# Altium PCB QCopterFCs_Pcb.PcbDoc
Units mm, origin at the board's own origin, x right, y up, seen from the top; angles counter-clockwise.
Board outline 26 x 26 mm, 4 copper layers (Top Layer, Signal Layer 1, Signal Layer 2, Bottom Layer), stack 0.98 mm thick; 39 components, 54 nets, 258 pads, 82 vias.
Unrouted connection lines stored in the file: 1.
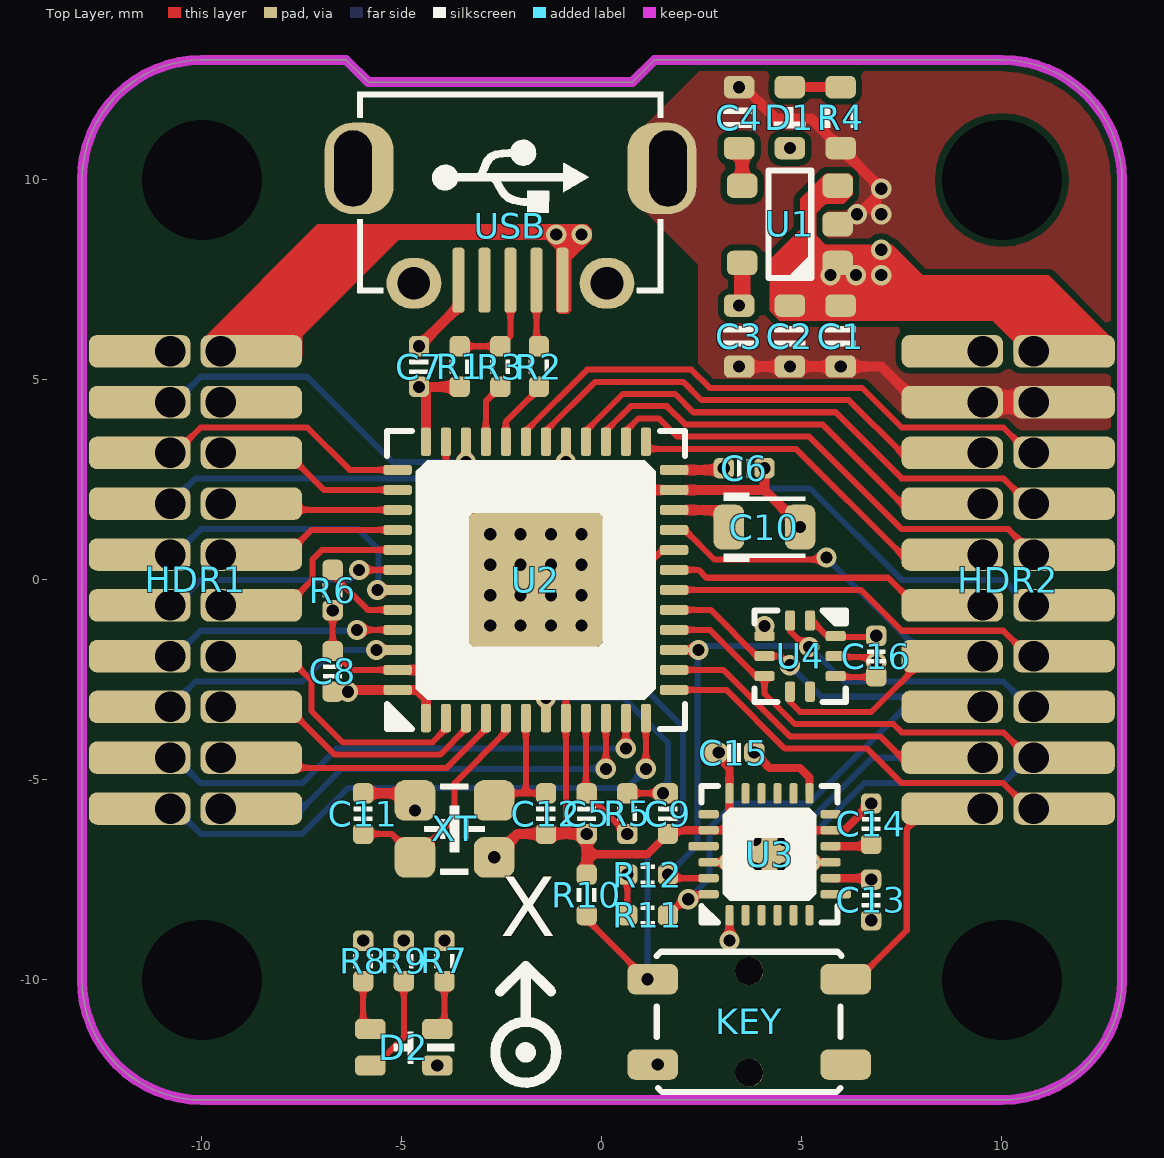
[diagram p0: Top Layer view]
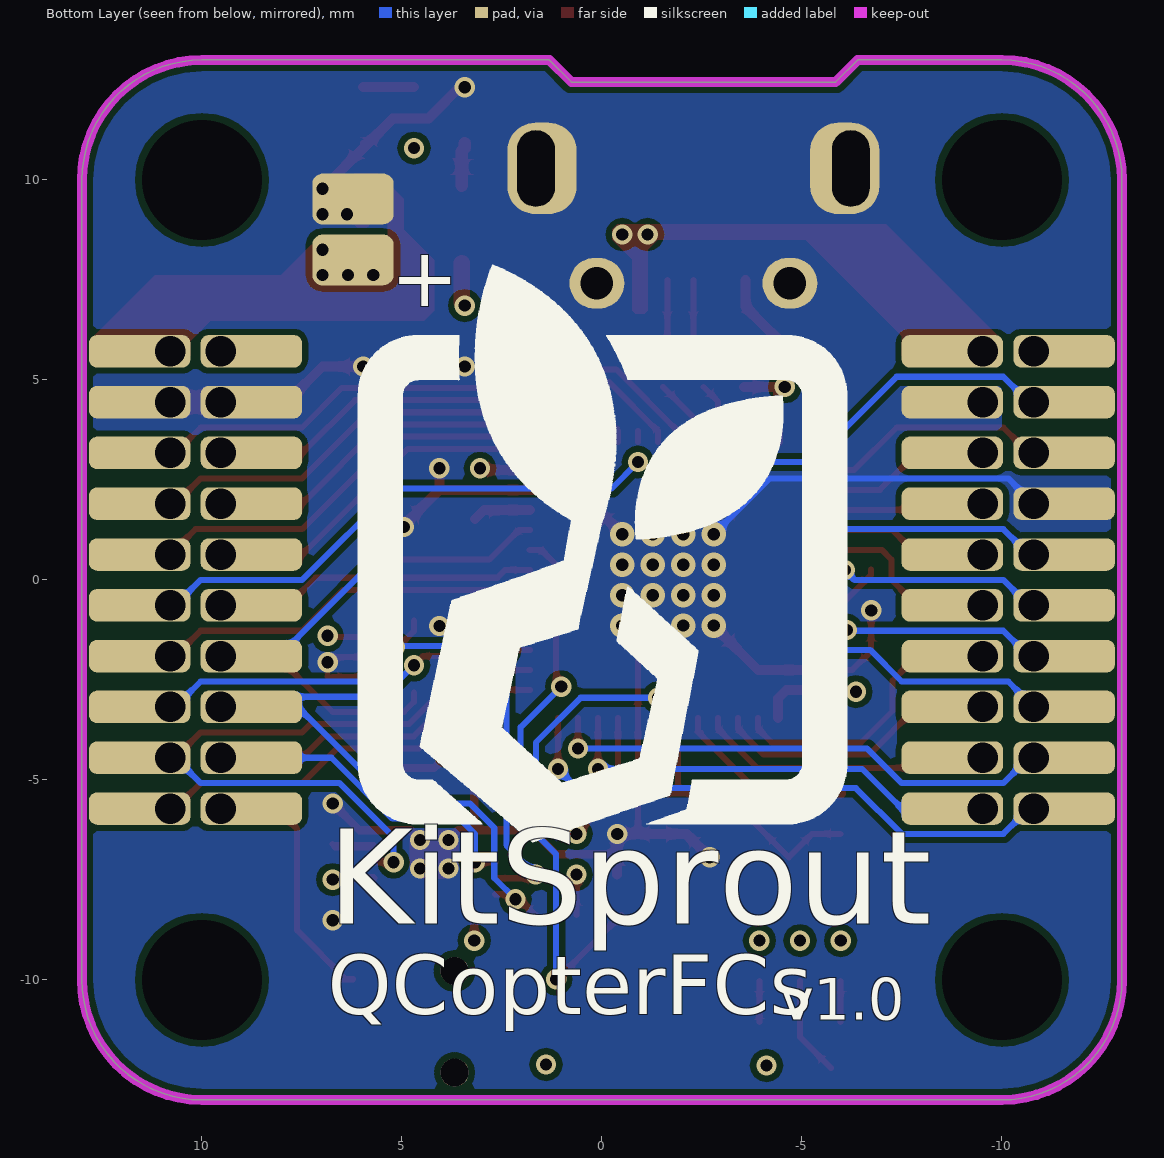
[diagram p1: Bottom Layer view, seen from below]
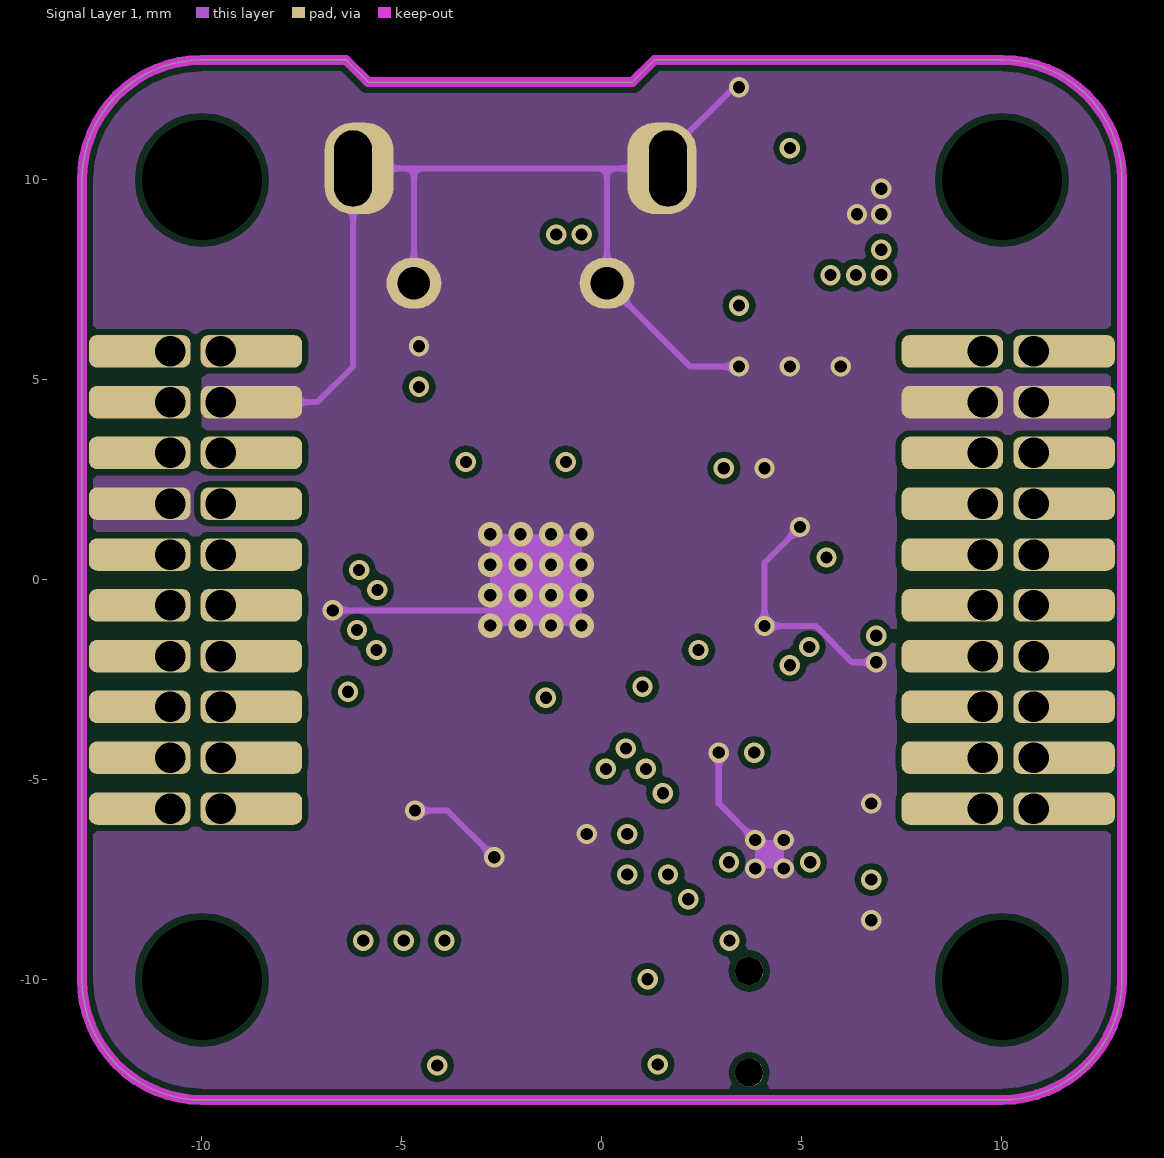
[diagram p2: Signal Layer 1]
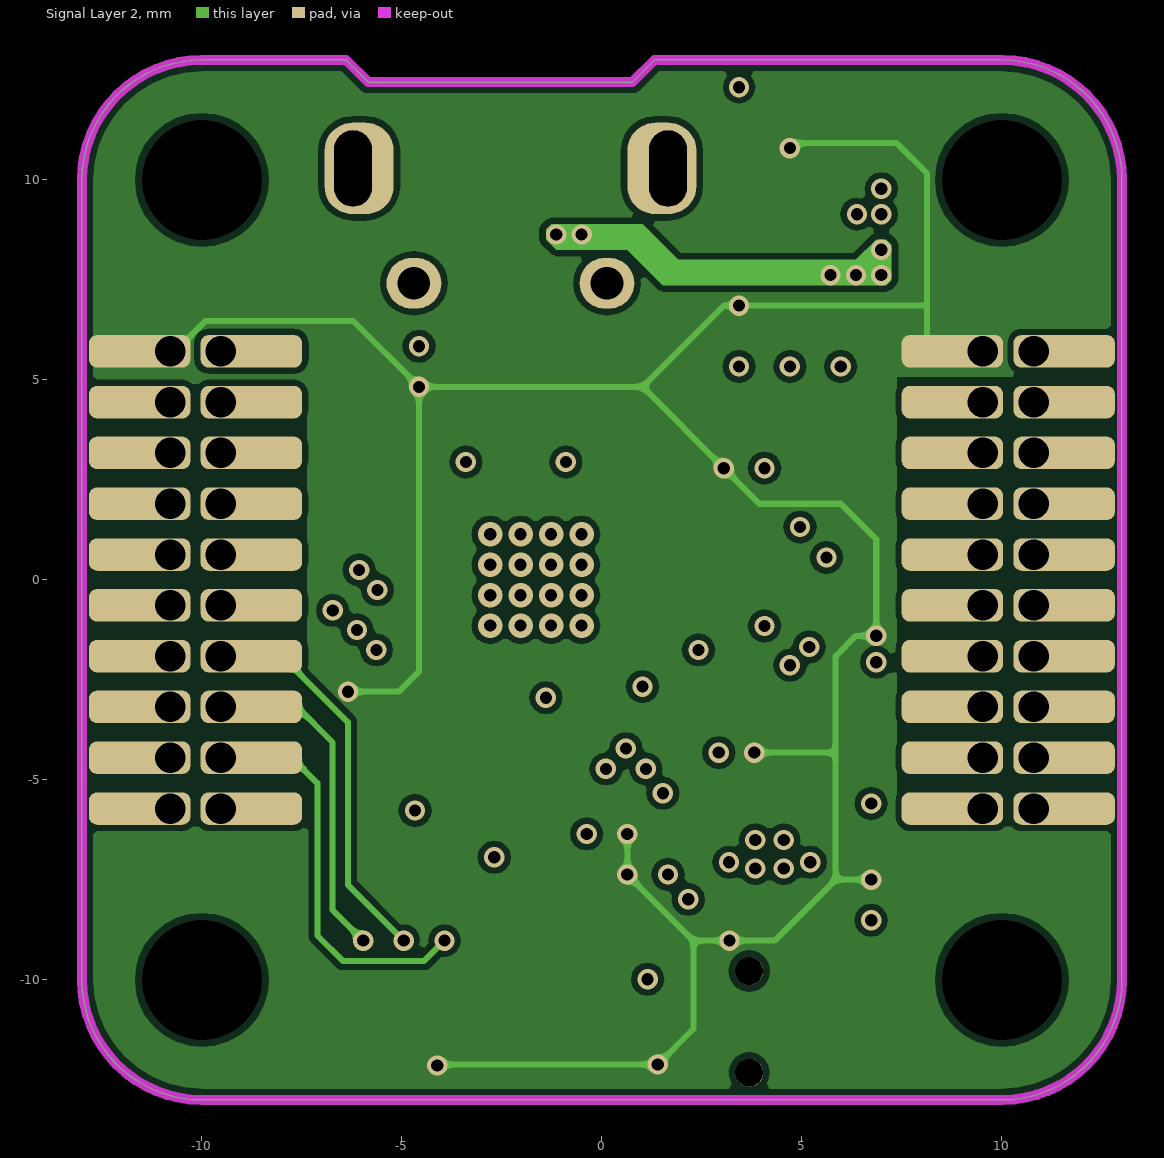
[diagram p3: Signal Layer 2]
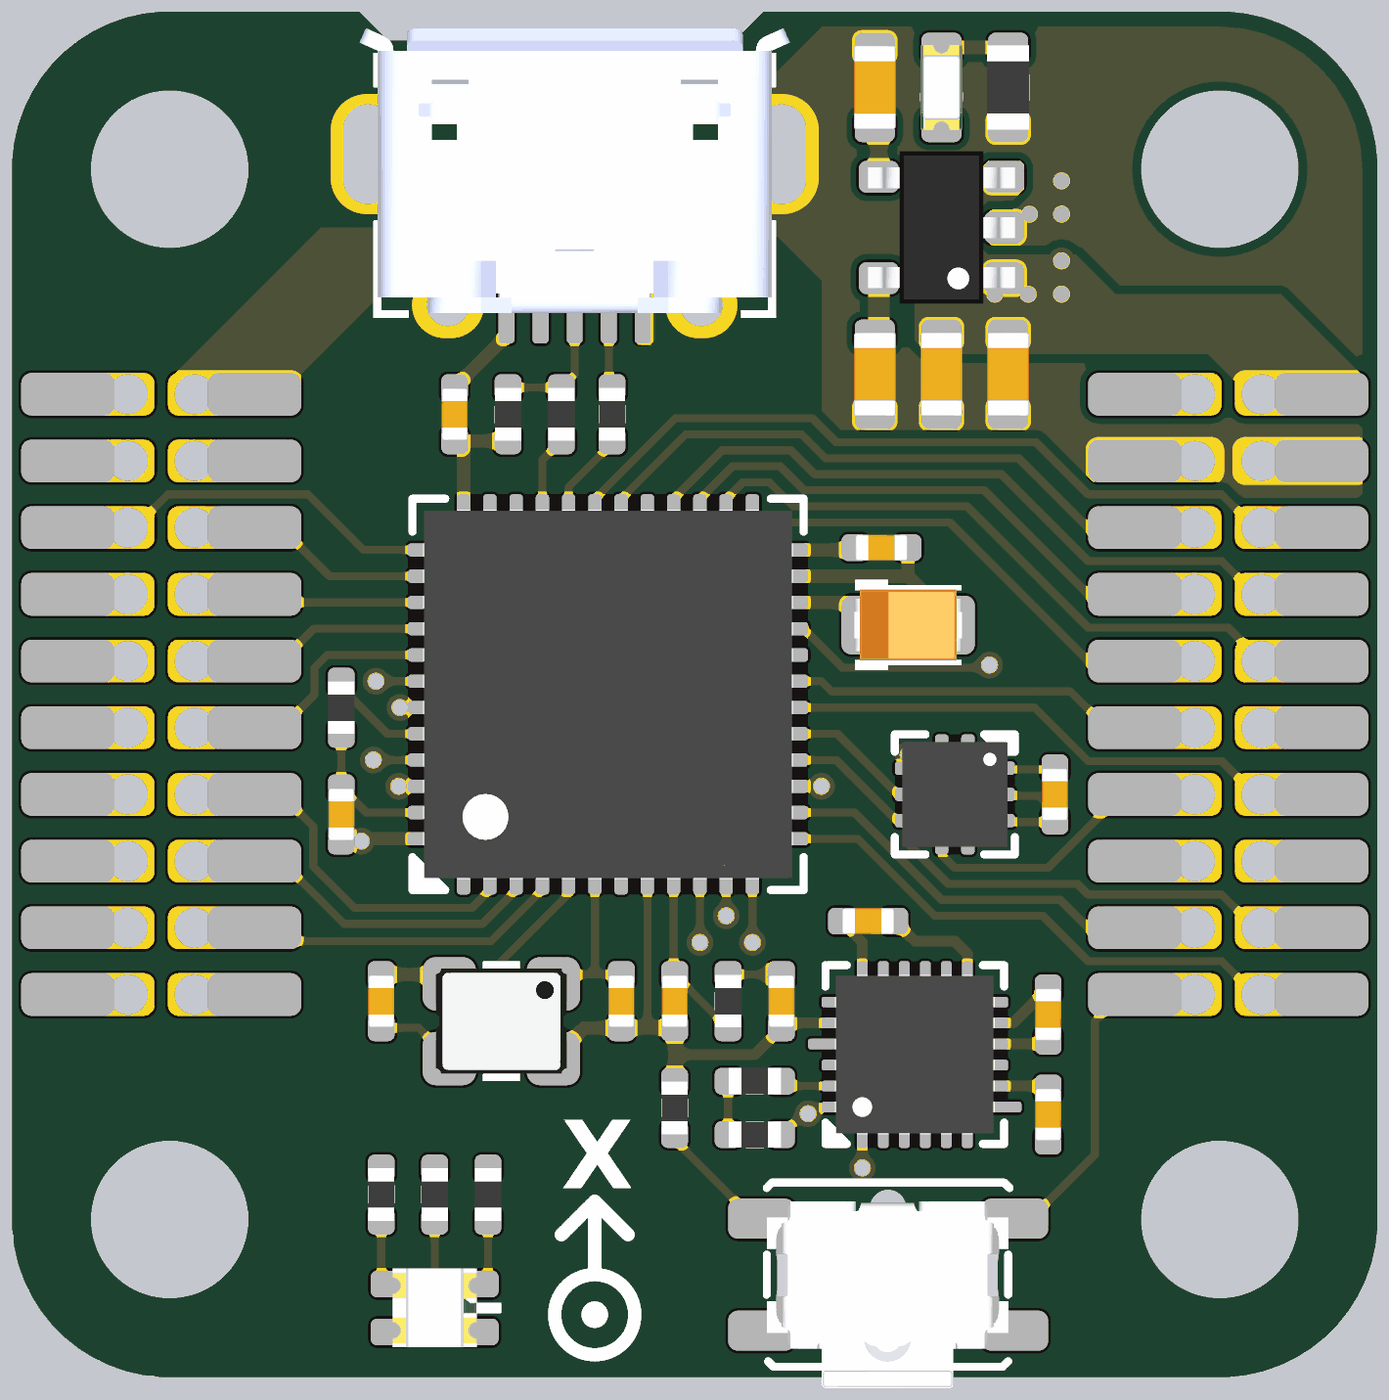
[diagram p4: 3D render of the assembled board from above, using the file's embedded part models]

## Layer stack, top to bottom
Top Solder: solder mask 0.01, Solder Resist, Dk 3.5
Top Layer: signal copper 0.03
Dielectric 1: prepreg 0.1, Dk 4.2
Signal Layer 1: signal copper 0.01
Dielectric 3: core 0.7, FR-4, Dk 4.2
Signal Layer 2: signal copper 0.01
Dielectric 2: prepreg 0.1, Dk 4.2
Bottom Layer: signal copper 0.03
Bottom Solder: solder mask 0.01, Solder Resist, Dk 3.5

## Board outline
-13,-10 -13,10 cw(c-10,10) -10,13 -6.396,13 -5.842,12.446 0.762,12.446 1.316,13 10,13 cw(c10,10) 13,10 13,-10 cw(c10,-10) 10,-13 -10,-13 cw(c-10,-10)

## Design rules (kind name [scope] priority, off if disabled: settings)
BoardOutlineClearance [All] p1: gap=0.254 ignorepadtopadclearanceinfootprint=FALSE except(0: Arc-SplitContinuation Track-SplitContinuation SMDPad-SplitContinuation THPad-SplitContinuation Via-SplitContinuation Fill-SplitContinuation Poly-SplitContinuation Region-SplitContinuation Text-SplitContinuation)
Clearance ClearancePolygon [InPolygon] p1: gap=0.152 ignorepadtopadclearanceinfootprint=FALSE except(0: Arc-Hole Track-Hole SMDPad-Hole THPad-Hole Via-Hole Fill-Hole Poly-Hole Region-Hole Text-Hole)
Clearance [All] p2: gap=0.152 ignorepadtopadclearanceinfootprint=FALSE except(0: Arc-Hole Track-Hole SMDPad-Hole THPad-Hole Via-Hole Fill-Hole Poly-Hole Region-Hole Text-Hole)
ComponentClearance [All] p1: gap=0 collisioncheckmode=3 verticalgap=0 showdistances=FALSE
Height [All] p1: minheight=0 maxheight=127 prefheight=12.7
HoleSize [All] p1: absolutevalues=TRUE maxlimit=5.08 minlimit=0.025 maxpercent=80.000 minpercent=20.000
HoleToHoleClearance [All] p1: gap=0 allowstackedmicrovias=TRUE
MinimumAnnularRing [All] p1: minimumring=0.025
MinimumSolderMaskSliver [All] p1: minsoldermaskwidth=0
PolygonConnect [All] p1: connectstyle=Direct reliefconductorwidth=0.254 reliefentries=4 polygonreliefangle="90 Angle" airgapwidth=0.254
RoutingVias [All] p1: holewidth=0.305 width=0.61 viastyle="Through Hole" minholewidth=0.305 minwidth=0.508 maxholewidth=0.711 maxwidth=1.27
SMDEntry [All] p1: side=TRUE corner=TRUE anyangle=TRUE
SilkToSilkClearance [All] p1: silktosilkclearance=0
SilkToSolderMaskClearance [IsPad] p1: minsilkscreentomaskgap=0 clearancetoexposedcopper=TRUE
SolderMaskExpansion [All] p1: expansion=0.051
Width [All] p1: maxlimit=2.54 minlimit=0.152 preferedwidth=0.254
23 further rules are at their usual default settings.

## Components (designator, comment, footprint, x,y, rotation, side; value= is the part's Value field where it differs from the comment)
C1 "Cap_0603" CAP_0603 5.969,6.096 r90 top value=1u
C2 "Cap_0603" CAP_0603 4.699,6.096 r90 top value=0.1u
C3 "Cap_0603" CAP_0603 3.429,6.096 r90 top value=0.1u
C4 "Cap_0603" CAP_0603 3.429,11.557 r270 top value=22n
C5 "Cap_0402" CAP_0402 -0.381,-5.842 r90 top value=0.1u
C6 "Cap_0402" CAP_0402 3.556,2.794 r180 top value=0.1u
C7 "Cap_0402" CAP_0402 -4.572,5.334 r270 top value=0.1u
C8 "Cap_0402" CAP_0402 -6.731,-2.286 r270 top value=0.1u
C9 "Cap_0402" CAP_0402 1.651,-5.842 r90 top value=0.1u
C10 "Cap_Tan_0805" CAP_TAN_P0805 4.064,1.321 r0 top value=2.2u
C11 "Cap_0402" CAP_0402 -5.969,-5.842 r270 top value=10p
C12 "Cap_0402" CAP_0402 -1.397,-5.842 r90 top value=10p
C13 "Cap_0402" CAP_0402 6.731,-8.001 r270 top value=10n
C14 "Cap_0402" CAP_0402 6.731,-6.096 r90 top value=0.1u
C15 "Cap_0402" CAP_0402 3.302,-4.318 r0 top value=0.1u
C16 "Cap_0402" CAP_0402 6.858,-1.905 r270 top value=0.1u
D1 "LED_0603" LED_0603_YELLOW 4.699,11.557 r90 top
D2 "LED_1616_RGB" LED_1616_RGB -4.953,-11.684 r0 top
HDR1 "HDR2x10_1.27" HDR2X10_1.27_180S -11.938,5.715 r0 top locked
HDR2 "HDR2x10_1.27" HDR2X10_1.27_180S 8.382,5.715 r0 top locked
KEY "ButtonTACT" ButtonTACT_3.5*3.55_90 3.683,-11.049 r180 top
R1 "Res_0402" RES_0402 -3.556,5.334 r270 top value=1.5K
R2 "Res_0402" RES_0402 -1.575,5.334 r90 top value=22R
R3 "Res_0402" RES_0402 -2.54,5.334 r90 top value=22R
R4 "Res_0603" RES_0603 5.969,11.557 r90 top value=1K
R5 "Res_0402" RES_0402 0.635,-5.842 r90 top value=10K
R6 "Res_0402" RES_0402 -6.731,-0.254 r90 top value=10K
R7 "Res_0402" RES_0402 -3.937,-9.525 r90 top value=680R
R8 "Res_0402" RES_0402 -5.969,-9.525 r90 top value=1K
R9 "Res_0402" RES_0402 -4.953,-9.525 r90 top value=220R
R10 "Res_0402" RES_0402 -0.381,-7.874 r90 top value=10K
R11 "Res_0402" RES_0402 1.143,-8.382 r0 top value=4.7K
R12 "Res_0402" RES_0402 1.143,-7.366 r0 top value=4.7K
U1 "RT9193" SOT23-5 4.699,8.89 r180 top
U2 "STM32F411C" QFN_P0.5_48 -1.651,0 r90 top
U3 "MPU925x" QFN_P0.4_24 4.191,-6.858 r90 top
U4 "LPS22HB" HCLGA-2x2_10 4.953,-1.905 r270 top
USB "USB_Micro" USB_Micro-AB -2.286,10.033 r0 top
XT "XTAL_2520_4P" XT_2520_4 -3.683,-6.223 r180 top value=16MHz

## Footprints (in the part's own frame and the unit in brackets; to place one, negate y for a bottom-side part, rotate by r counter-clockwise, add the part's x,y. Pads: shape width x height; smd on the part's side, far side on the other; paste and mask are expansions set on the pad)
ButtonTACT_3.5*3.55_90 [mil]
  round 27.56 hole 27.56 unplated mask+0: 0(-0.01,-50) 0(0,50)
  rrect50% 50x30 smd: 1(-95,42) 2(-95,-42) 3(95,42) 4(95,-42)
  silkscreen extent -91,-69 91,69, body extent -90,-55 91,85, height 56
CAP_0402 [mil]
  rrect50% 20x20 smd: 1(-20,0) 2(20,0)
  silkscreen extent -7,-9 7,9, body extent -20,-10 20,10, height 20
CAP_0603 [mil]
  rrect50% 22x30 smd: 1(-30,0) 2(30,0)
  silkscreen extent -10,-15 10,15, body extent -31,-16 31,16, height 31
CAP_TAN_P0805 [mil]
  rrect50% 30x44 smd: 1(-35,0) 2(35,0)
  silkscreen extent -40,-34 40,34, body extent -40,-27 40,27, height 59
HCLGA-2x2_10 [mil]
  rrect50% 20x10 smd: 1(-35,9.84) 2(-35,-9.84) 6(35,-9.84) 7(35,9.84)
  rrect50% 10x20 smd: 3(-19.69,-35) 4(0,-35) 5(19.68,-35) 8(19.68,35) 9(0,35) 10(-19.69,35)
  silkscreen extent -45,-45 45,45, body extent -39,-39 39,39, height 31
HDR2X10_1.27_180S [mil]
  rrect50% 70x32 smd: 1(0,0) 2(140,0) 3(0,-50) 4(140,-50) 5(0,-100) 6(140,-100) 7(0,-150) 8(140,-150) 9(0,-200) 10(140,-200) 11(0,-250) 12(140,-250) 13(0,-300) 14(140,-300) 15(0,-350) 16(140,-350) 17(0,-400) 18(140,-400) 19(0,-450) 20(140,-450)
LED_0603_YELLOW [mil]
  rrect50% 22x30 smd: 1(-30,0) 2(30,0)
  silkscreen extent -10,-16 10,16, body extent -32,-16 32,16, height 24
LED_1616_RGB [mil]
  rrect50% 30x20 smd: 1(-33,-18) 2(-33,18) 3(33,18) 4(33,-18)
  silkscreen extent -10,-16 50,16, body extent -31,-30 31,30, height 13
QFN_P0.4_24 [mil]
  rrect50% 20x8 smd: 1(-60,39.37) 2(-60,23.62) 3(-60,7.87) 4(-60,-7.87) 5(-60,-23.62) 6(-60,-39.37) 13(60,-39.37) 14(60,-23.62) 15(60,-7.87) 16(60,7.87) 17(60,23.62) 18(60,39.37)
  rrect50% 8x20 smd: 7(-39.37,-60) 8(-23.62,-60) 9(-7.87,-60) 10(7.87,-60) 11(23.62,-60) 12(39.37,-60) 19(39.37,60) 20(23.62,60) 21(7.87,60) 22(-7.87,60) 23(-23.62,60) 24(-39.37,60)
  rrect20% 32x32 smd: 25(0,0)
  silkscreen extent -67,-67 67,67, body extent -60,-60 60,60, height 39
QFN_P0.5_48 [mil]
  rrect50% 28x10 smd: 1(-136,108.27) 2(-136,88.58) 3(-136,68.9) 4(-136,49.21) 5(-136,29.53) 6(-136,9.84) 7(-136,-9.84) 8(-136,-29.53) 9(-136,-49.21) 10(-136,-68.9) 11(-136,-88.58) 12(-136,-108.27) 25(136,-108.27) 26(136,-88.58) 27(136,-68.9) 28(136,-49.21) 29(136,-29.53) 30(136,-9.84) 31(136,9.84) 32(136,29.53) 33(136,49.21) 34(136,68.9) 35(136,88.58) 36(136,108.27)
  rrect50% 10x28 smd: 13(-108.27,-136) 14(-88.58,-136) 15(-68.9,-136) 16(-49.21,-136) 17(-29.53,-136) 18(-9.84,-136) 19(9.84,-136) 20(29.53,-136) 21(49.21,-136) 22(68.9,-136) 23(88.58,-136) 24(108.27,-136) 37(108.27,136) 38(88.58,136) 39(68.9,136) 40(49.21,136) 41(29.53,136) 42(9.84,136) 43(-9.84,136) 44(-29.53,136) 45(-49.21,136) 46(-68.9,136) 47(-88.58,136) 48(-108.27,136)
  rrect10% 132x132 smd: 49(0,0)
  silkscreen extent -147,-147 147,147, body extent -139,-139 139,139, height 22
RES_0402 [mil]
  rrect50% 20x20 smd: 1(-20,0) 2(20,0)
  silkscreen extent -7,-10 7,10, body extent -20,-10 20,10, height 14
RES_0603 [mil]
  rrect50% 22x30 smd: 1(-30,0) 2(30,0)
  silkscreen extent -10,-16 10,16, body extent -31,-16 31,16, height 18
SOT23-5 [mil]
  rrect50% 30x24 smd: 1(-47,38) 2(-47,0) 3(-47,-38) 4(47,-38) 5(47,38)
  silkscreen extent -21,-53 21,53, body extent -55,-57 55,57, height 57
USB_Micro-AB [mil]
  rrect80% 68x90 hole 37 slot 75 at 90 deg copper offset 6,0 mask+0: 0(-155,10)
  oval 54x50 hole 32 mask+0: 0(-95,-103) 0(95,-103)
  rrect80% 68x90 hole 37 slot 75 at 90 deg copper offset -6,0 mask+0: 0(155,10)
  rrect50% 12x64 smd: 1(51.18,-100) 2(25.59,-100) 3(0,-100) 4(-25.59,-100) 5(-51.18,-100)
  silkscreen extent -150,-112 150,86, body extent -161,-109 161,104, height 108
XT_2520_4 [mil]
  rrect50% 40x40 smd: 1(39,28) 2(-39,28) 3(-39,-28) 4(39,-28)
  silkscreen extent -30,-44 30,44, body extent -49,-39 49,39, height 31

## Part data
C1 C2 C3 C4 C5 C6 C7 C8 C9 C10 C11 C12 C13 C14 C15 C16: "Capacitor"
D1 D2: "LED"
HDR1 HDR2: "Header"
KEY: "Button"
R1 R2 R3 R4 R5 R6 R7 R8 R9 R10 R11 R12: "Resistor"
U1: "Power"
U2: library part STM32F4x1C, "MCU"
U3: "Sensor Motion"
U4: "Sensor Pressure"
USB: "USB"
XT: "Crystal Oscillator"

## Free pads (board coordinates)
  rrect50% 2.54x0.813 hole 0.762 copper offset -0.762,0: 0(-10.795,-5.715) 0(-10.795,-4.445) 0(-10.795,-3.175) 0(-10.795,-1.905) 0(-10.795,-0.635) 0(-10.795,0.635) 0(-10.795,1.905) 0(-10.795,3.175) 0(-10.795,4.445) 0(-10.795,5.715) 0(9.525,-5.715) 0(9.525,-4.445) 0(9.525,-3.175) 0(9.525,-1.905) 0(9.525,-0.635) 0(9.525,0.635) 0(9.525,1.905) 0(9.525,3.175) 0(9.525,4.445) 0(9.525,5.715)
  round 2.921 hole 3 unplated mask+0: 0(-10,-10) 0(-10,10) 0(10,-10) 0(10,10)
  rrect50% 2.54x0.813 hole 0.762 copper offset 0.762,0: 0(-9.525,-5.715) 0(-9.525,-4.445) 0(-9.525,-3.175) 0(-9.525,-1.905) 0(-9.525,-0.635) 0(-9.525,0.635) 0(-9.525,1.905) 0(-9.525,3.175) 0(-9.525,4.445) 0(-9.525,5.715) 0(10.795,-5.715) 0(10.795,-4.445) 0(10.795,-3.175) 0(10.795,-1.905) 0(10.795,-0.635) 0(10.795,0.635) 0(10.795,1.905) 0(10.795,3.175) 0(10.795,4.445) 0(10.795,5.715)
  rrect40% 2.032x1.27 smd far side mask+0.051: 0(6.223,8.001) 0(6.223,9.525)
  rrect50% 0.508x0.203 smd: 2(2.413,-6.658) 2(5.969,-7.858)

## Via types
v1: diameter 0.508, hole 0.305, Top Layer to Bottom Layer, tented both sides, 66 vias
v2: diameter 0.61, hole 0.305, Top Layer to Bottom Layer, tented both sides, 16 vias

## Nets (pads, with @x,y where several pads share a name; then routed paths per layer and width w, separated by ;. In a path a pad name is that pad's centre, name@x,y a point inside that pad or via, vN(x,y) a via of type N, cw(c..) or ccw(c..) an arc to the next point about the centre after c; other vN are vias at no path point)
3V3: C3.2 C5.2 C6.2 C7.2 C8.2 C13.1 C15.2 C16.1 D1.1 D2.4 HDR1.1 HDR2.1 KEY.3 pad.0@9.525,5.715 pad.0@-10.795,5.715 R1.2 R5.1 R11.1 R12.1 U1.5 U2.1 U2.9 U2.24 U2.36 U2.48 U3.1 U3.8 U3.13 U4.1 U4.10 | length 92.4
  Top Layer w0.152: C5.2@-0.401,-5.334 U2.9 ; C5.2 v1(0.635,-6.35) ; R11.1 v1(0.635,-7.366) ; v1(3.429,6.858) C3.2@3.505,6.934 ; U4.1@5.301,-1.067 U4.10@5.639,-1.405 ; U4.10@5.639,-1.43 C16.1@6.723,-1.43 ; C13.1@6.696,-7.458 v1(6.731,-7.493)
  Top Layer w0.203: v1(3.191,-9.017) U3.1 ; v1(3.81,-4.318) 4.191,-4.699 4.953,-4.699 5.191,-4.937 U3.13 ; U3.8 C13.1@6.696,-7.458
  Top Layer w0.254: v1@-6.477,-2.75 U2.48 -4.616,-2.75 -4.401,-2.965 U2.1 ; U2.36 -4.401,4.826 R1.2 ; U2.24 C6.2@2.953,2.75 ; C6.2@2.953,2.699 v1(3.048,2.794)
  Top Layer w0.406: C3.2@3.505,6.934 U1.5
  Signal Layer 2 w0.152: pad.0@-10.795,5.715 -10.668,5.715 -9.906,6.477 -6.223,6.477 v1(-4.572,4.826) ; v1(-6.35,-2.794) -5.08,-2.794 -4.572,-2.286 v1(-4.572,4.826) ; v1(-4.115,-12.141) -4.089,-12.116 v1(1.397,-12.116) 2.286,-11.227 2.286,-9.017 ; v1(0.635,-6.35) v1(0.635,-7.366) 2.286,-9.017 ; v1(3.81,-4.318) 5.842,-4.318 ; v1@4.699,10.922 7.366,10.922 8.128,10.16 8.128,6.858 ; v1(6.731,-7.493) 5.842,-7.493 ; pad.0@9.525,5.715 8.128,5.715 8.128,6.858 ; v1(-4.572,4.826) 1.016,4.826 ; 1.016,4.826 v1(3.048,2.794) 3.937,1.905 5.969,1.905 6.858,1.016 v1(6.858,-1.397) 6.35,-1.397 5.842,-1.905 5.842,-4.318 ; 1.016,4.826 3.048,6.858 v1(3.429,6.858) 8.128,6.858 ; 2.286,-9.017 v1(3.191,-9.017) 4.318,-9.017 5.842,-7.493 ; 5.842,-7.493 5.842,-4.318
  other v1: 4.699,10.795
AUX_CL: pad.2@5.969,-7.858 U3.7
AUX_DA: pad.2@2.413,-6.658 U3.21
BOOT: R6.2 U2.44 | length 2.1
  Top Layer w0.152: R6.2 -6.731,0.127 -5.854,-0.75 U2.44
EA0: HDR1.20 pad.0@-9.525,-5.715 U2.10 | length 11.3
  Top Layer w0.152: v1(0.099,-4.724) U2.10
  Bottom Layer w0.152: pad.0@-9.525,-5.715 -7.493,-5.715 -6.502,-4.724 v1(0.099,-4.724) v1@0.102,-4.727
EA1: HDR1.17 pad.0@-10.795,-4.445 U2.11 | length 12.7
  Top Layer w0.152: v1(0.599,-4.216) U2.11
  Bottom Layer w0.152: pad.0@-10.732,-4.381 -10.033,-5.08 -7.493,-5.08 -6.629,-4.216 v1(0.599,-4.216)
EA2: HDR1.19 pad.0@-10.795,-5.715 U2.12 | length 14.1
  Top Layer w0.152: v1(1.099,-4.724) U2.12
  Bottom Layer w0.152: pad.0@-10.732,-5.651 -10.033,-6.35 -7.493,-6.35 -6.35,-5.207 0.616,-5.207 v1(1.099,-4.724)
EA3: HDR2.20 pad.0@10.795,-5.715 U2.13 | length 10.2
  Top Layer w0.152: U2.13 3.108,-2.75 4.574,-4.216 6.629,-4.216 7.493,-5.08 10.033,-5.08 pad.0@10.732,-5.779
EA8: HDR2.12 pad.0@10.795,-0.635 U2.29 | length 13.4
  Top Layer w0.152: U2.29 U2.29@-0.901,3.723
  Bottom Layer w0.152: v1(-0.901,2.946) -0.241,2.286 5.207,2.286 7.493,0 10.033,0 pad.0@10.732,-0.699
EA9: HDR2.5 pad.0@9.525,3.175 U2.30 | length 12.4
  Top Layer w0.152: U2.30 -1.401,3.723 -0.171,4.953 2.032,4.953 2.489,4.496 6.172,4.496 7.493,3.175 HDR2.5 pad.0@9.525,3.175
EA10: HDR2.6 pad.0@10.795,3.175 U2.31 | length 14.4
  Top Layer w0.152: U2.31 -1.901,3.723 -0.366,5.258 2.235,5.258 2.692,4.801 6.502,4.801 7.493,3.81 10.033,3.81 pad.0@10.732,3.111
EA15: HDR1.6 pad.0@-9.525,3.175 U2.38 | length 4.8
  Top Layer w0.152: pad.0@-9.525,3.175 -7.874,3.175 -6.949,2.25 U2.38
EB0: HDR2.14 pad.0@10.795,-1.905 U2.18 | length 9.6
  Top Layer w0.152: U2.18 6.473,-0.25 7.493,-1.27 10.033,-1.27 pad.0@10.732,-1.969
EB1: HDR2.11 pad.0@9.525,-0.635 U2.19 | length 8.1
  Top Layer w0.152: U2.19 2.417,0.25 2.612,0.055 7.156,0.055 7.846,-0.635 HDR2.11 pad.0@9.525,-0.635
EB3: HDR1.8 pad.0@-9.525,1.905 U2.39 | length 4.5
  Top Layer w0.152: pad.0@-9.525,1.905 -9.37,1.75 U2.39
EB4: HDR1.10 pad.0@-9.525,0.635 U2.40 | length 4.7
  Top Layer w0.152: pad.0@-9.525,0.635 -7.874,0.635 -7.259,1.25 U2.40
EB5: HDR1.12 pad.0@-9.525,-0.635 U2.41 | length 5.3
  Top Layer w0.152: pad.0@-9.525,-0.635 -7.874,-0.635 -7.239,0 -7.239,0.508 -6.997,0.75 U2.41
EB6: HDR1.11 pad.0@-10.795,-0.635 U2.42 | length 6.1
  Top Layer w0.152: v1(-6.071,0.25) U2.42
  Bottom Layer w0.152: pad.0@-10.795,-0.635 -10.668,-0.635 -10.033,0 -6.321,0 v1(-6.071,0.25)
EB7: HDR1.9 pad.0@-10.795,0.635 U2.43 | length 7.2
  Top Layer w0.152: v1(-5.613,-0.25) U2.43
  Bottom Layer w0.152: pad.0@-10.795,0.635 -10.668,0.635 -10.033,1.27 -6.096,1.27 -5.588,0.762 v1@-5.588,-0.25
EB8: HDR1.13 pad.0@-10.795,-1.905 U2.45 | length 6
  Top Layer w0.152: v1(-6.121,-1.25) U2.45
  Bottom Layer w0.152: pad.0@-10.795,-1.905 -10.668,-1.905 -10.033,-1.27 v1@-6.121,-1.27
EB9: HDR1.15 pad.0@-10.795,-3.175 U2.46 | length 6.3
  Top Layer w0.152: v1@-5.613,-1.75 U2.46
  Bottom Layer w0.152: pad.0@-10.795,-3.175 -10.16,-2.54 -7.493,-2.54 -6.703,-1.75 v1(-5.639,-1.75) v1@-5.613,-1.75
EB12: HDR2.9 pad.0@9.525,0.635 U2.25 | length 9.7
  Top Layer w0.152: U2.25 1.099,3.277 4.851,3.277 7.493,0.635 HDR2.9 pad.0@9.525,0.635
EB13: HDR2.10 pad.0@10.795,0.635 U2.26 | length 12
  Top Layer w0.152: U2.26 0.599,3.723 0.915,4.039 1.422,4.039 1.88,3.581 5.182,3.581 7.493,1.27 10.16,1.27 pad.0@10.795,0.635
EB14: HDR2.7 pad.0@9.525,1.905 U2.27 | length 11
  Top Layer w0.152: U2.27 0.099,3.723 0.719,4.343 1.626,4.343 2.083,3.886 5.512,3.886 7.493,1.905 HDR2.7 pad.0@9.525,1.905
EB15: HDR2.8 pad.0@10.795,1.905 U2.28 | length 12.9
  Top Layer w0.152: U2.28 -0.401,3.723 0.524,4.648 1.829,4.648 2.286,4.191 5.842,4.191 7.493,2.54 10.033,2.54 pad.0@10.732,1.841
GND: C1.1 C2.1 C3.1 C4.1 C5.1 C6.1 C7.1 C8.1 C9.1 C10.2 C11.1 C12.1 C13.2 C14.2 C15.1 C16.2 HDR1.4 HDR1.7 HDR2.3 HDR2.4 pad.0@6.223,9.525 pad.0@9.525,4.445 pad.0@10.795,4.445 pad.0@-9.525,4.445 pad.0@-10.795,1.905 R4.1 R6.1 R10.2 U1.2 U2.8 U2.23 U2.35 U2.47 U2.49 U3.11 U3.18 U3.20 U3.25 U4.3 U4.8 U4.9 USB.0 USB.5 XT.2 XT.4 | length 106.5
  Top Layer w0.152: v1(-6.731,-0.762) C8.1 -6.259,-2.25 U2.47 ; U2.35 -3.901,2.25 v2(-2.794,1.143) ; v2(-1.27,-1.143) -0.901,-1.512 U2.8 -0.901,-6.35 ; U4.8@5.842,-2.43 C16.2@6.739,-2.43 ; U4.9@5.842,-1.93 6.731,-1.93 v1(6.858,-2.057) C16.2@6.858,-2.311 ; U1.2 6.096,8.89 6.35,9.144 v1(6.985,9.779) ; R4.1 R4.1@5.969,10.922 ; C16.2@6.739,-2.532 C16.2 ; pad.0@7.874,4.445 HDR2.3 pad.0@9.525,4.445
  Top Layer w0.203: -0.381,-6.858 1.143,-6.858 1.743,-6.258 U3.20 3.191,-6.258 ; C15.1 3.191,-4.715 U3.18 3.191,-6.258 ; v1(3.835,-6.502) 3.591,-6.258 3.191,-6.258 ; v1(4.547,-6.502) 4.791,-6.258 U3.11 6.061,-6.258 v1(6.731,-5.588)
  Top Layer w0.254: C11.1 XT.4@-4.851,-5.334 ; U2.47 -3.901,-2.25 v2(-2.794,-1.143) ; v1(-4.572,5.842) -3.586,6.828 USB.5 ; v1(-2.692,-6.934) -2.108,-6.35 C12.1 -0.901,-6.35 v1(-0.381,-6.35) -0.381,-6.858 R10.2 ; v2(-0.508,1.143) 0.599,2.25 U2.23 4.064,2.25 ; v1(3.429,5.334) v1(4.699,5.334) v1(5.969,5.334) 6.985,5.334 pad.0@7.874,4.445 ; C4.1@3.429,12.446 4.343,11.532 5.232,11.532 R4.1 v1(6.985,9.779) ; C6.1@4.064,2.845 4.064,2.25 ; C10.2@4.953,1.361 4.064,2.25
  Top Layer w0.508: pad.0@9.525,4.445 pad.0@10.795,4.445
  Signal Layer 1 w0.152: pad.0@-9.525,4.445 -7.112,4.445 -6.223,5.334 -6.223,10.287 -4.699,10.287 ; v1(-6.731,-0.762) -2.794,-0.762 v2(-2.794,-1.143) ; USB.0@-4.699,7.417 -4.699,10.287 ; v1(-4.674,-5.766) -3.861,-5.766 v1(-2.692,-6.934) ; v1(2.921,-4.318) 2.921,-5.588 v1(3.835,-6.502) ; v1(3.429,5.334) 2.21,5.334 0.127,7.417 0.127,10.287 ; v1@3.429,12.446 1.651,10.668 1.651,10.287 0.127,10.287 ; v1(4.953,1.321) 4.064,0.432 v1(4.064,-1.151) 5.342,-1.151 6.248,-2.057 v1(6.858,-2.057) ; -4.699,10.287 0.127,10.287
  Bottom Layer w0.152: pad.0@-10.795,1.905 -10.16,2.54 -4.191,2.54 v2(-2.794,1.143)
  other v1: 6.731,-8.509 3.835,-7.214 4.547,-7.214 4.064,2.794 6.375,9.144 6.985,9.144 3.429,12.319
  other v2: -2.032,-1.143 -0.508,-1.143 -2.794,-0.381 -2.032,-0.381 -1.27,-0.381 -0.508,-0.381 -2.794,0.381 -2.032,0.381 -1.27,0.381 -0.508,0.381 -2.032,1.143 -1.27,1.143
KEY: HDR2.19 KEY.2 KEY.4 pad.0@9.525,-5.715 R10.1 U2.20 | length 20.9
  Top Layer w0.152: R10.1@-0.483,-8.382 KEY.4@1.118,-9.982 ; v1@1.143,-2.667 1.143,0.381 1.512,0.75 U2.20 ; KEY.2@6.223,-9.982 KEY.2@6.401,-9.982 ; KEY.2@6.528,-9.982 KEY.2@6.401,-9.982 ; pad.0@9.525,-5.715 HDR2.19 8.128,-5.715 7.62,-6.223 7.62,-8.763 KEY.2@6.401,-9.982
  Bottom Layer w0.152: v1(1.016,-2.667) 2.032,-3.683 2.032,-5.969 1.143,-6.858 v1(1.143,-9.982)
LED_B: HDR1.18 pad.0@-9.525,-4.445 R7.2 U2.4 | length 17.5
  Top Layer w0.152: pad.0@-9.525,-4.445 -9.271,-4.699 -3.877,-4.699 -2.901,-3.723 U2.4
  Signal Layer 2 w0.152: pad.0@-9.525,-4.445 -7.747,-4.445 -7.112,-5.08 -7.112,-8.89 -6.477,-9.525 -4.445,-9.525 v1(-3.937,-9.017)
LED_G: HDR1.16 pad.0@-9.525,-3.175 R8.2 U2.3 | length 15.6
  Top Layer w0.152: pad.0@-9.525,-3.175 -7.874,-3.175 -6.68,-4.369 -4.047,-4.369 -3.401,-3.723 U2.3
  Signal Layer 2 w0.152: pad.0@-9.525,-3.175 -7.62,-3.175 -6.731,-4.064 -6.731,-8.255 v1(-5.969,-9.017)
LED_R: HDR1.14 pad.0@-9.525,-1.905 R9.2 U2.2 | length 17.3
  Top Layer w0.152: pad.0@-9.525,-1.905 -7.874,-1.905 -7.264,-2.515 -7.264,-3.277 -6.477,-4.064 -4.242,-4.064 -3.901,-3.723 U2.2
  Signal Layer 2 w0.152: pad.0@-9.525,-1.905 -8.001,-1.905 -6.35,-3.556 -6.35,-7.62 v1(-4.953,-9.017)
M_CSB: HDR2.13 pad.0@9.525,-1.905 U2.21 U4.6 | length 14.8
  Top Layer w0.152: U2.21 2.072,1.25 2.814,0.508 v1@5.588,0.508 ; U4.6@4.703,-2.819 4.703,-3.052 4.953,-3.302 6.731,-3.302 8.128,-1.905 HDR2.13 pad.0@9.525,-1.905
  Bottom Layer w0.152: v1(5.613,0.559) 8.077,-1.905 pad.0@9.525,-1.905
M_CSM: HDR2.17 pad.0@9.525,-4.445 U2.14 U3.22 | length 17
  Top Layer w0.152: U2.14 3.039,-2.25 4.7,-3.912 6.96,-3.912 7.493,-4.445 HDR2.17 pad.0@9.525,-4.445 ; U3.22 v1(3.175,-7.058)
  Bottom Layer w0.152: v1(3.175,-7.058) 3.175,-6.35 3.556,-5.969 5.236,-5.969 6.76,-4.445 pad.0@9.525,-4.445
M_INTB: U4.7
M_INTM: U3.12
M_SCK: HDR2.16 pad.0@10.795,-3.175 R12.2 U2.15 U3.23 U4.2 | length 17.7
  Top Layer w0.152: v1(1.651,-7.366) 1.743,-7.458 U3.23 ; U2.15 v1(2.413,-1.75) v1@2.52,-1.75 ; U4.2 4.703,-1.285 v1@5.196,-1.778
  Bottom Layer w0.152: v1(1.651,-7.366) 2.388,-6.629 v1@2.388,-1.648 ; v1@2.413,-1.648 v1@5.158,-1.648 ; v1(5.182,-1.676) 6.045,-2.54 10.033,-2.54 pad.0@10.732,-3.239
M_SDI: HDR2.15 pad.0@9.525,-3.175 R11.2 U2.17 U3.24 U4.4 | length 20.1
  Top Layer w0.152: R11.2 2.175,-7.858 U3.24 ; U2.17 2.717,-0.75 U4.4@3.897,-1.93 ; U4.4@3.897,-1.905 U4.4 4.47,-1.905 v1(4.699,-2.134)
  Bottom Layer w0.152: v1(2.159,-7.985) 2.692,-7.452 2.692,-6.198 3.302,-5.588 5.186,-5.588 7.599,-3.175 9.525,-3.175 9.271,-2.921 5.486,-2.921 v1(4.699,-2.134)
M_SDO: HDR2.18 pad.0@10.795,-4.445 U2.16 U3.9 U4.5 | length 18.1
  Top Layer w0.152: U2.16 2.698,-1.25 U4.5@3.878,-2.43 ; U4.5@3.878,-2.405 U4.5 ; U4.5@4.064,-2.43 4.064,-2.844 4.827,-3.607 7.29,-3.607 7.493,-3.81 10.033,-3.81 pad.0@10.732,-4.509 ; v1(5.207,-7.058) U3.9
  Bottom Layer w0.152: v1(5.207,-7.058) 5.207,-6.43 6.557,-5.08 10.033,-5.08 10.668,-4.445 pad.0@10.795,-4.445
NetC4_2: C4.2 U1.4 | length 1.1
  Top Layer w0.305: C4.2@3.429,10.922 C4.2 3.505,10.719 U1.4
NetD1_2: D1.2 R4.2 | length 1.3
  Top Layer w0.254: D1.2 R4.2
NetD2_1: D2.1 R9.1 | length 2.5
  Top Layer w0.152: D2.1@-5.728,-12.205 -4.953,-11.43 R9.1
NetD2_2: D2.2 R8.1 | length 1
  Top Layer w0.152: D2.2@-5.969,-11.049 R8.1
NetD2_3: D2.3 R7.1 | length 1
  Top Layer w0.152: D2.3@-3.937,-11.049 R7.1
NetR1_1: R1.1 R3.2 USB.3 | length 2.8
  Top Layer w0.152: R1.1 R3.2 -2.286,6.096 USB.3
NetR2_2: R2.2 USB.2 | length 1.7
  Top Layer w0.152: R2.2@-1.636,5.842 USB.2
REG: C14.1 U3.10 | length 1
  Top Layer w0.152: C14.1@6.677,-6.658 C14.1
  Top Layer w0.203: U3.10 C14.1@6.677,-6.658
RST: C9.2 R5.2 U2.7 | length 6.4
  Top Layer w0.152: U2.7 v1(-1.401,-2.946) ; R5.2 C9.2
  Bottom Layer w0.152: v1(-1.401,-2.946) 0.533,-2.946 1.651,-4.064 1.651,-5.207 v1(1.524,-5.334)
SWCLK: HDR1.5 pad.0@-10.795,3.175 U2.37 | length 6.3
  Top Layer w0.152: pad.0@-10.668,3.175 -10.033,3.81 -7.366,3.81 -6.306,2.75 U2.37
SWDIO: HDR1.3 pad.0@-10.795,4.445 U2.34 | length 9
  Top Layer w0.152: v1(-3.401,2.946) U2.34
  Bottom Layer w0.152: pad.0@-10.795,4.445 -10.668,4.445 -10.033,5.08 -7.366,5.08 -5.232,2.946 v1(-3.401,2.946)
USB.DM: R2.1 U2.32 | length 1.7
  Top Layer w0.152: U2.32 -2.401,3.949 R2.1@-1.524,4.826
USB.DP: R3.1 U2.33 | length 1.5
  Top Layer w0.152: U2.33 -2.901,4.465 R3.1
VCAP: C10.1 U2.22 | length 1.5
  Top Layer w0.254: U2.22 2.949,1.75 C10.1@3.175,1.524
VIN: C1.2 C2.2 HDR1.2 HDR2.2 pad.0@6.223,8.001 pad.0@10.795,5.715 pad.0@-9.525,5.715 U1.1 U1.3 USB.1 | length 21.2
  Top Layer w0.305: pad.0@-9.525,5.715 -8.61,5.715 -5.612,8.712 -1.265,8.712 -0.986,8.433 USB.1 ; C2.2 C1.2 5.893,6.934 U1.1 5.791,7.925 5.207,8.509 5.207,9.232 5.83,9.855 U1.3
  Top Layer w0.508: C1.2 9.752,6.858 10.795,5.815 pad.0@10.795,5.715
  other v1: 5.715,7.62 6.35,7.62 6.985,7.62 6.985,8.255 -1.143,8.636 -0.508,8.636
XT_I: C11.2 U2.5 XT.1 | length 6
  Top Layer w0.152: C11.2 -5.258,-6.35 XT.1 -3.683,-5.944 -3.683,-5.08 -2.401,-3.798 U2.5
XT_O: C12.2 U2.6 XT.3 | length 3
  Top Layer w0.152: XT.3@-2.536,-5.334 -1.901,-5.334 ; U2.6 -1.901,-5.334 ; C12.2 -1.901,-5.334
pads on no net: KEY.0 KEY.1 U3.2 U3.3 U3.4 U3.5 U3.6 U3.14 U3.15 U3.16 U3.17 U3.19 USB.4

## Polygon pours and split planes (outlines as drawn)
GND on Top Layer "Mechanical 1-No Net" (solid, remove dead copper, pour order 5): 1.016,9.271 1.016,11.303 2.713,13 10,13 cw(c10,10) 13,10 13,3.556 2.413,3.556 2.413,7.874
GND on Bottom Layer "GND_L04_P003" (solid, remove dead copper, pour order 3): -13,-10 -13,10 cw(c-10,10) -10,13 -6.396,13 -5.842,12.446 0.762,12.446 1.316,13 10,13 cw(c10,10) 13,10 13,-10 cw(c10,-10) 10,-13 -10,-13 cw(c-10,-10)
GND on Signal Layer 1 "GND_L02_P002" (solid, remove dead copper, pour order 2): -13,-10 -13,10 cw(c-10,10) -10,13 -6.396,13 -5.842,12.446 0.762,12.446 1.316,13 10,13 cw(c10,10) 13,10 13,-10 cw(c10,-10) 10,-13 -10,-13 cw(c-10,-10)
3V3 on Signal Layer 2 "3V3_L03_P000" (solid, remove dead copper, pour order 0): -13,-10 -13,10 cw(c-10,10) -10,13 -6.396,13 -5.842,12.446 0.762,12.446 1.316,13 10,13 cw(c10,10) 13,10 13,-10 cw(c10,-10) 10,-13 -10,-13 cw(c-10,-10)
no net on Keep-Out Layer "Mechanical 1-No Net" (none): -13,-10 -13,10 cw(c-10,10) -10,13 -6.396,13 -5.842,12.446 0.762,12.446 1.316,13 10,13 cw(c10,10) 13,10 13,-10 cw(c10,-10) 10,-13 -10,-13 cw(c-10,-10)

## Other copper
Top Layer:
  region net GND: 4.547,-6.502 4.547,-6.248 3.835,-6.248 3.835,-6.502 3.581,-6.502 3.581,-7.214 3.835,-7.214 3.835,-7.468 4.547,-7.468 4.547,-7.214 4.801,-7.214 4.801,-6.502
  region net VIN: 6.985,8.255 6.985,7.62 5.715,7.62
  region net GND: 6.985,9.779 6.985,9.144 6.35,9.144
  region net VIN: 5.588,10.16 6.198,10.16 6.274,10.084 6.274,9.627 6.045,9.398 5.588,9.398 5.359,9.169 5.359,8.611 5.588,8.382 7.264,8.382 8.026,7.62 11.176,7.62 12.7,6.096 12.7,5.461 12.573,5.334 10.541,5.334 10.287,5.588 10.287,5.969 9.779,6.477 4.445,6.477 4.191,6.731 4.191,8.001 4.953,8.763 4.953,9.525
  region net VIN: -9.906,6.096 -9.906,5.334 -7.747,5.334 -7.493,5.588 -7.493,6.096 -5.08,8.509 -1.397,8.509 -1.143,8.255 -1.143,6.731 -1.067,6.655 -0.838,6.655 -0.762,6.731 -0.762,8.001 -0.254,8.509 -0.254,8.763 -0.381,8.89 -7.112,8.89
Signal Layer 1:
  pour cut-out: 7.366,3.556 13,3.556 13,-6.096 7.366,-6.096
  pour cut-out: -7.366,-6.096 -13,-6.096 -13,1.016 -7.366,1.016
  pour cut-out: -13,5.334 -10,5.334 -10,2.794 -13,2.794
  region net GND: 3.835,-6.502 4.547,-6.502 4.547,-7.214 3.835,-7.214
  region net GND: -2.794,1.143 -0.508,1.143 -0.508,-1.143 -2.794,-1.143
Signal Layer 2:
  pour cut-out: 13,5.08 7.366,5.08 7.366,-6.096 13,-6.096
  pour cut-out: -13,4.826 -7.366,4.826 -7.366,-6.096 -13,-6.096
  region net VIN: -1.27,8.89 -1.397,8.763 -1.397,8.509 -1.143,8.255 0.635,8.255 1.524,7.366 7.112,7.366 7.239,7.493 7.239,8.382 7.112,8.509 6.858,8.509 6.35,8.001 1.905,8.001 1.016,8.89
Bottom Layer:
  pour cut-out: 7.366,3.556 13,3.556 13,-6.096 7.366,-6.096
  pour cut-out: -7.366,-6.096 -13,-6.096 -13,1.016 -7.366,1.016
  pour cut-out: -13,5.334 -10,5.334 -10,2.794 -13,2.794

## Silkscreen, mask and mechanical layers (free items; w line width, h text height)
Top Overlay:
  circle w0.254: c-1.905,-11.811 r0.762
  circle w0.254: c-1.905,-11.811 r0.127
  lines w0.254: -2.54,-10.287 -1.905,-9.652 ; -1.905,-11.049 -1.905,-9.652 ; -1.27,-10.287 -1.905,-9.652
  text "X" at -2.54,-9.398 h2.54
Bottom Overlay:
  drawing of 3459 lines, arcs and shapes, not listed
  text "+" at 5.283,6.35 h2.54
  text "KitSprout" at 6.859,-9.374 h4.06
  text "v1.0" at -4.456,-11.349 h1.78
  text "QCopterFCs" at 6.859,-11.349 h2.54
Mechanical 1:
  the board outline again, w0.051
T-Component:
  circle w0.051: c-10,-10 r3.302
  circle w0.051: c-10,10 r3.302
  circle w0.051: c10,10 r3.302
  circle w0.051: c10,-10 r3.302